# Altium PCB Transmitter.PcbDoc
Units mm, origin at the board's own origin, x right, y up, seen from the top; angles counter-clockwise.
Board outline 81.2 x 70.87 mm, 2 copper layers (Top Layer, Bottom Layer); 53 components, 19 nets, 126 pads, 96 vias.
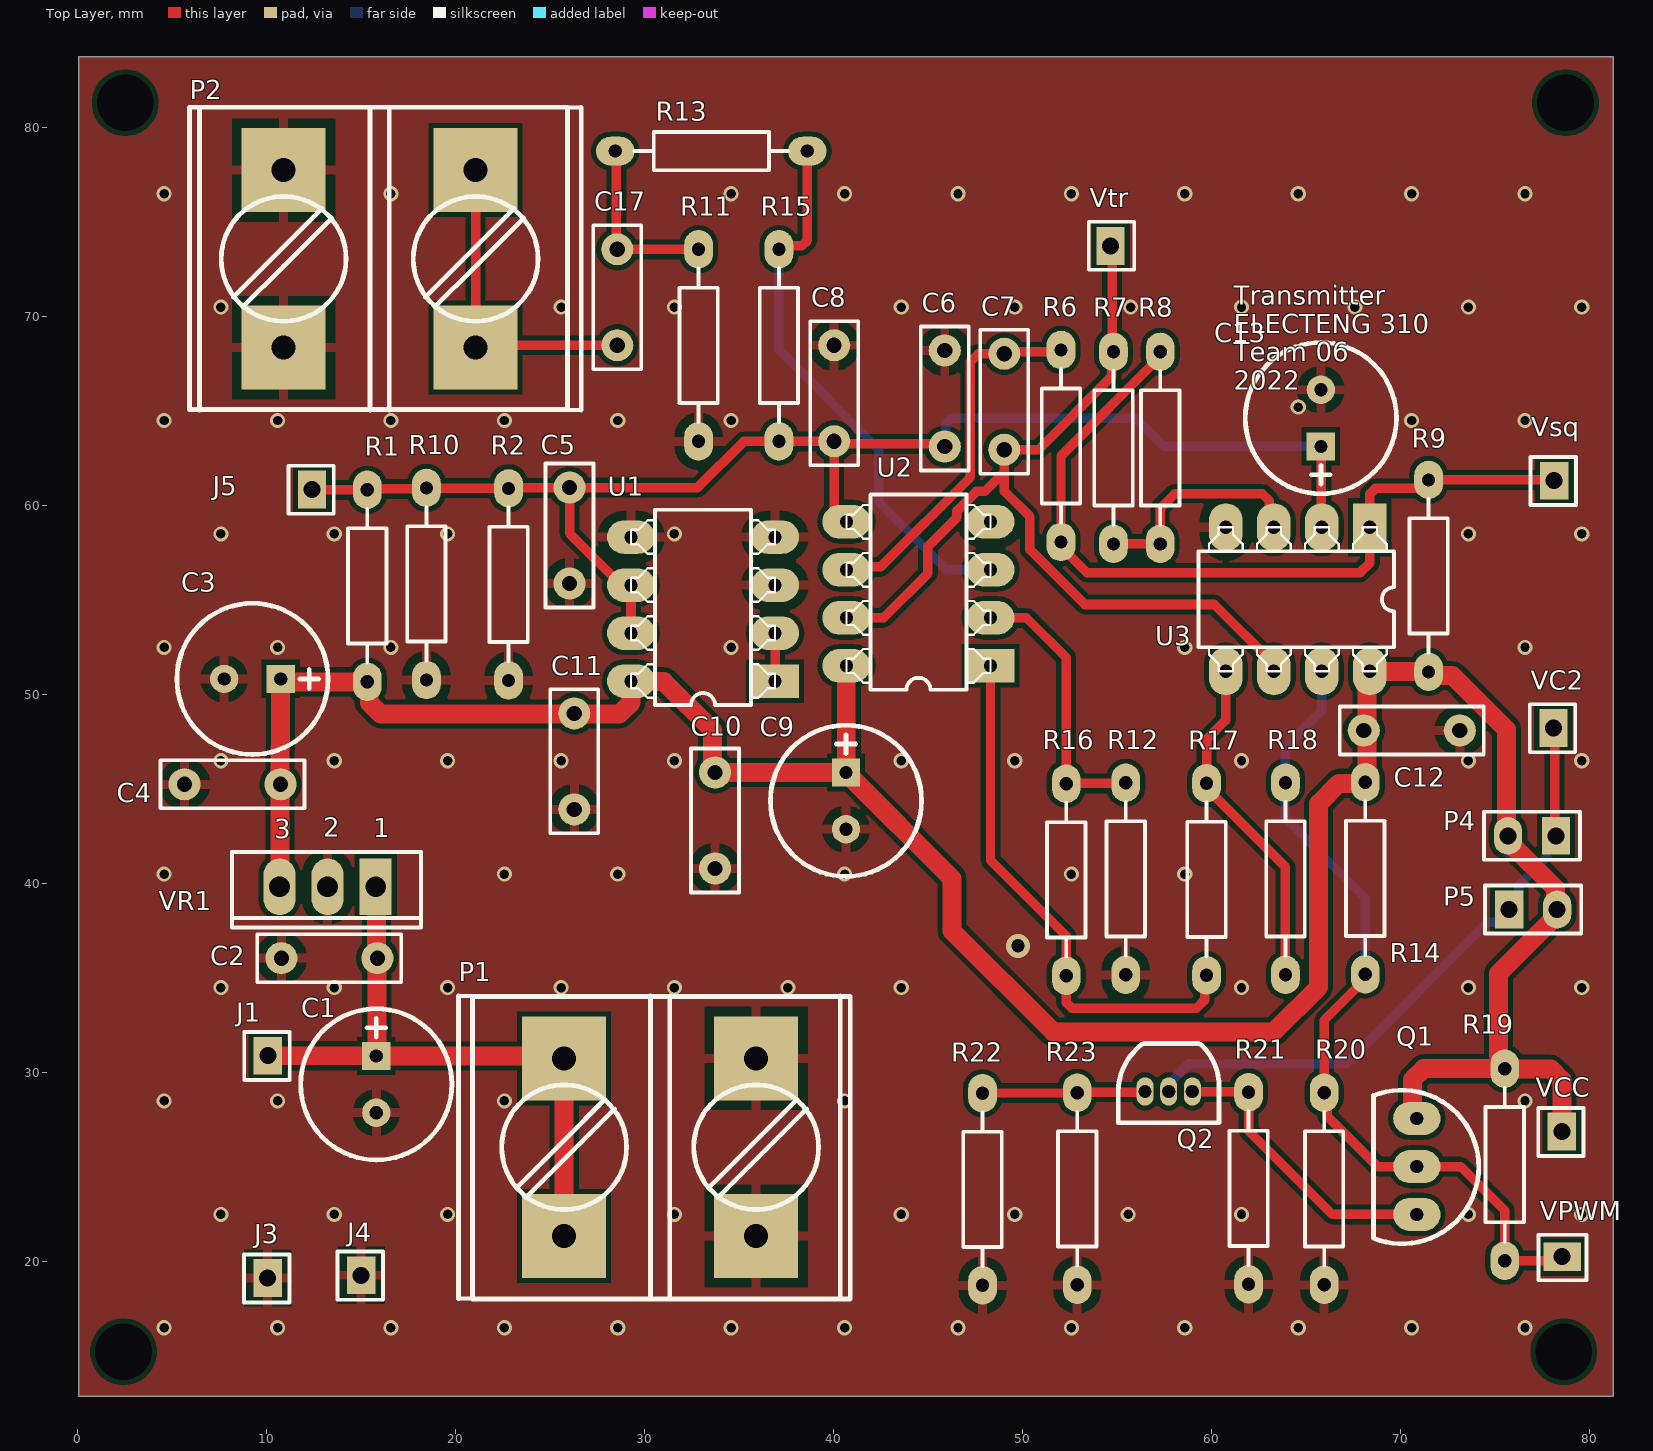
[diagram p0: Top Layer view]
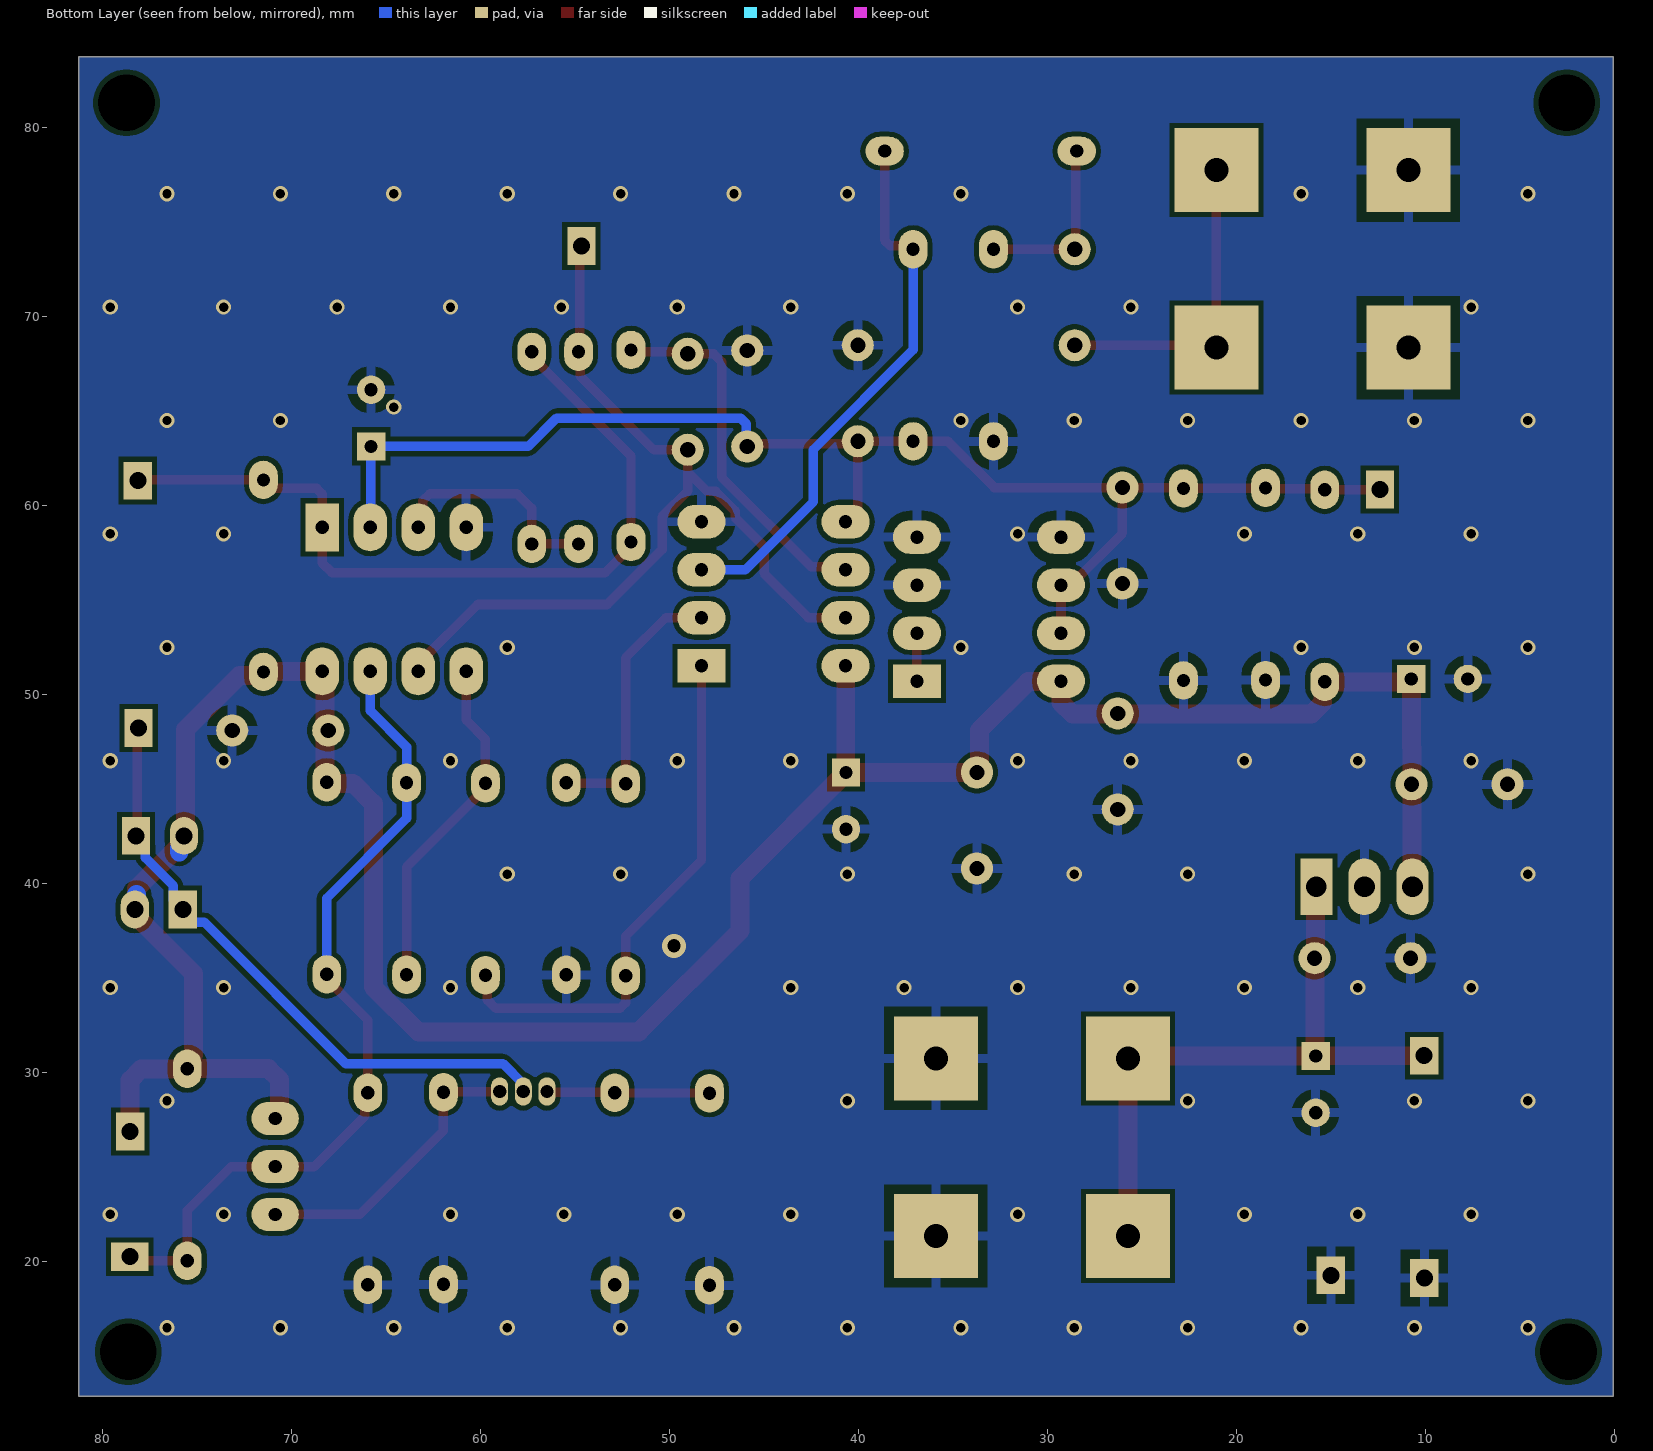
[diagram p1: Bottom Layer view, seen from below]

## Layer stack, top to bottom
Top Solder: solder mask 0.0102, Solder Resist, Dk 3.5
Top Layer: signal copper 0.0356
Dielectric 1: dielectric 0.32, FR-4, Dk 4.8
Bottom Layer: signal copper 0.0356
Bottom Solder: solder mask 0.0102, Solder Resist, Dk 3.5

## Board outline
0.075,12.85 0.075,83.725 81.275,83.725 81.275,12.85

## Design rules (kind name [scope] priority, off if disabled: settings)
Clearance [All] p1: gap=0.254 ignorepadtopadclearanceinfootprint=FALSE except(0: Arc-Hole Track-Hole SMDPad-Hole THPad-Hole Via-Hole Fill-Hole Poly-Hole Region-Hole Text-Hole)
HoleSize [All] p1: absolutevalues=TRUE maxlimit=5 minlimit=0.025 maxpercent=80.000 minpercent=20.000
MinimumSolderMaskSliver [All] p1: minsoldermaskwidth=0.1
PolygonConnect [All] p1: thpad.connectstyle=Relief thpad.reliefconductorwidth=0.5 thpad.reliefentries=4 thpad.polygonreliefangle="90 Angle" thpad.airgapwidth=0.5 smdpad.connectstyle=Relief smdpad.reliefconductorwidth=0.5 smdpad.reliefentries=4 smdpad.polygonreliefangle="90 Angle" smdpad.airgapwidth=0.5 via.connectstyle=Direct via.reliefconductorwidth=0.5 via.reliefentries=4 via.polygonreliefangle="90 Angle" via.airgapwidth=0.5
RoomDefinition "Triangle Wave Generator" [InComponentClass('Triangle Wave Generator')] p1: confinementstyle=ConfineIn formatcopy=TRUE lockcomponents=FALSE outline -25.4,-25.527 25.4,-25.527 25.4,-0.127 -25.4,-0.127
RoomDefinition Regulator [InComponentClass('Regulator')] p2: confinementstyle=ConfineIn formatcopy=TRUE lockcomponents=FALSE outline -25.4,-25.527 25.4,-25.527 25.4,-0.127 -25.4,-0.127
RoomDefinition "PWM Generator" [InComponentClass('PWM Generator')] p3: confinementstyle=ConfineIn formatcopy=TRUE lockcomponents=FALSE outline -25.4,-25.527 25.4,-25.527 25.4,-0.127 -25.4,-0.127
RoomDefinition ISR [InComponentClass('ISR')] p4: confinementstyle=ConfineIn formatcopy=TRUE lockcomponents=FALSE outline -25.4,-25.527 25.4,-25.527 25.4,-0.127 -25.4,-0.127
RoomDefinition Amplifier [InComponentClass('Amplifier')] p5: confinementstyle=ConfineIn formatcopy=TRUE lockcomponents=FALSE outline -25.4,-25.527 25.4,-25.527 25.4,-0.127 -25.4,-0.127
RoutingVias [All] p1: holewidth=0.711 width=1.27 viastyle="Through Hole" minholewidth=0.711 minwidth=1.27 maxholewidth=0.711 maxwidth=1.27
SilkToSilkClearance [All] p1: silktosilkclearance=0.1
SilkToSolderMaskClearance [IsPad] p1: minsilkscreentomaskgap=0.1 clearancetoexposedcopper=TRUE
SolderMaskExpansion [All] p1: expansion=0.102 istentingtop=FALSE
Width [All] p1: maxlimit=1 minlimit=0.254 preferedwidth=0.5
26 further rules are at their usual default settings.

## Classes and differential pairs
component class "PWM Generator": R14 R17 R18 VPWM
component class "Triangle Wave Generator": C6 C7 C8 C9 C10 C11 C12 R6 R7 R8 R9 U3 Vsq Vtr
component class Regulator: C1 C2 C3 C4 C5 C13 J1 J3 J4 J5 P1 R1 R2 R10 U1 VCC VR1
component class ISR: C17 P2 R11 R12 R13 R15 R16 U2
component class Amplifier: P4 P5 Q1 Q2 R19 R20 R21 R22 R23 VC2

## Components (designator, comment, footprint, x,y, rotation, side; value= is the part's Value field where it differs from the comment)
C1 "22uF" ece-CAPAD2TH0.3 15.825,30.85 r270 top
C2 "330 nF" ece-RAD0.2 15.88,36.025 r180 top
C3 "10uF" ece-CAPAD2TH0.3 10.775,50.8 r180 top
C4 "100 nF" ece-RAD0.2 10.755,45.225 r180 top
C5 "100 nF" ece-RAD0.2 26.05,60.925 r270 top
C6 "100nF" ece-RAD0.2 45.9,68.18 r270 top
C7 "1.5nF" ece-RAD0.2 49.05,68.005 r270 top
C8 "100nF" ece-RAD0.2 40.05,68.455 r270 top
C9 "10uF" ece-CAPAD2TH0.3 40.675,45.85 r270 top
C10 "100 nF" ece-RAD0.2 33.75,45.855 r270 top
C11 "100 nF" ece-RAD0.2 26.3,48.98 r270 top
C12 "100 nF" ece-RAD0.2 68.07,48.075 r0 top
C13 "10uF" ece-CAPAD2TH0.3 65.8,63.1 r90 top
C17 "1uF" ece-RAD0.2 28.575,68.453 r90 top
J1 "Vbatt" ece-HDR1 10.09,30.865 r0 top
J3 "GND" ece-HDR1 10.075,19.1 r0 top
J4 "GND" ece-HDR1 15.025,19.25 r0 top
J5 "Vcc/2" ece-HDR1 12.425,60.825 r0 top
P1 "Header 2" ece-TER2-10MM 35.925,30.723 r90 top
P2 "Header 2" ece-TER2-10MM 10.922,68.326 r270 top
P4 "Header 2" ece-HDR1X2 78.24,42.5 r180 top
P5 "Header 2" ece-HDR1X2 75.76,38.6 r0 top
Q1 "BC547/549" ece-TO-92Z 70.875,27.55 r270 top
Q2 "BC639" TO92 57.75,28.975 r0 top
R1 "18k" ece-AXIAL0.4 15.35,55.725 r270 top
R2 "39k" ece-AXIAL0.4 22.825,55.8 r90 top
R6 "10k" ece-AXIAL0.4 52.05,63.125 r90 top
R7 "330k" ece-AXIAL0.4 54.825,63.025 r270 top
R8 "820k" ece-AXIAL0.4 57.3,63.025 r90 top
R9 "1k" ece-AXIAL0.4 71.5,56.25 r270 top
R10 "27k" ece-AXIAL0.4 18.475,55.825 r90 top
R11 "8.2k" ece-AXIAL0.4 32.875,68.45 r90 top
R12 "68k" ece-AXIAL0.4 55.475,40.225 r270 top
R13 "68k" ece-AXIAL0.4 33.55,78.725 r180 top
R14 "1k" ece-AXIAL0.4 68.15,40.25 r270 top
R15 "33k" ece-AXIAL0.4 37.125,68.45 r90 top
R16 "33k" ece-AXIAL0.4 52.325,40.175 r90 top
R17 "1k" ece-AXIAL0.4 59.75,40.2 r270 top
R18 "27k" ece-AXIAL0.4 63.925,40.225 r270 top
R19 "2.2k" ece-AXIAL0.4 75.525,25.1 r270 top
R20 "1k" ece-AXIAL0.4 65.973,23.826 r270 top
R21 "1k" ece-AXIAL0.4 61.975,23.85 r270 top
R22 "39" ece-AXIAL0.4 47.9,23.8 r270 top
R23 "27" ece-AXIAL0.4 52.907,23.826 r270 top
U1 "TLC082" ECE-DIP8 36.92,50.685 r180 top
U2 "TLC082" ECE-DIP8 48.32,51.495 r180 top
U3 "LM393AN" ECE-DIP8 68.39,58.825 r270 top
VC2 "Vcc" ece-HDR1 78.103,48.212 r0 top
VCC "Vcc" ece-HDR1 78.55,26.85 r0 top (schematic designator J2)
VPWM "GND" ece-HDR1 78.568,20.238 r90 top
VR1 "*" ece-TO220 17.19,41.65 r180 top
Vsq "GND" ece-HDR1 78.144,61.291 r0 top
Vtr "GND" ece-HDR1 54.672,73.698 r180 top

## Footprints (in the part's own frame and the unit in brackets; to place one, negate y for a bottom-side part, rotate by r counter-clockwise, add the part's x,y. Pads: shape width x height; smd on the part's side, far side on the other; paste and mask are expansions set on the pad)
ece-AXIAL0.4 [mil]
  oval 80x60 hole 27.56: 1(-200,0) 2(200,0)
  silkscreen extent -160,-40 160,40
ece-CAPAD2TH0.3 [mm]
  rect 1.5x1.5 hole 0.7: 1(0,0)
  round 1.5 hole 0.7: 2(3,0)
  silkscreen extent -2.5,-4 5.5,4
ECE-DIP8 [mil]
  rect 100x70 hole 28: 1(0,0)
  oval 100x70 hole 28: 2(0,-100) 3(0,-200) 4(0,-300) 5(300,-300) 6(300,-200) 7(300,-100) 8(300,0)
  silkscreen extent 0,-357 300,50
ece-HDR1 [mm]
  rect 1.5x2 hole 0.9: 1(0,0)
  silkscreen extent -1.25,-1.29 1.15,1.25
ece-HDR1X2 [mm] "Header 2 way"
  rect 1.5x2 hole 0.9: 1(0,0)
  oval 1.5x2 hole 0.9: 2(2.54,0)
  silkscreen extent -1.27,-1.27 3.81,1.27
ece-RAD0.2 [mm]
  round 1.7 hole 0.8: 1(0,0) 2(5.08,0)
  silkscreen extent -1.27,-1.27 6.35,1.27
ece-TER2-10MM [mil]
  rect 175x175 hole 50: 1(-370,0) 1(0,0) 2(-370,400) 2(0,400)
  silkscreen extent -501,-196 130,620
ece-TO220 [mm]
  rect 1.7x3 hole 1.1: 1(1.4,1.85)
  oval 1.7x3 hole 1.1: 2(3.94,1.85) 3(6.48,1.85)
  silkscreen extent -1,0 9,4
ece-TO-92Z [mm]
  oval 1.75x2.5 hole 0.7: 1(0,0) 2(2.55,0) 3(5.08,0)
  silkscreen extent -1.49,-2.29 6.63,3.28
TO92 [mm]
  oval 0.9x1.5 hole 0.7: 1(-1.25,0) 2(0,0) 3(1.25,0)
  silkscreen extent -2.67,-1.65 2.67,2.54, body extent -2.61,-1.59 2.61,2.61, height 10

## Part data
C1 C3 C9 C13: library part "CAP 22uF TH", "Polarized Capacitor (Radial)", Manufacturer="Generic Components", Class I=Passive, Class II=Capacitor, Published=8-Jun-2000, Publisher="Altium Limited", Revision="July-2002: Re-released for DXP Platform."
C2 C4 C5 C6 C7 C8 C10 C11 C12 C17: library part CAP, "Capacitor Non Polarised Through Hole"
J1 J3 J4 J5 VC2 VCC VPWM Vsq Vtr: library part "Test pin", "Socket", LatestRevisionDate=17-Jul-2002, LatestRevisionNote="Re-released for DXP Platform.", Publisher="Altium Limited"
P1 P2: library part "TERMINAL 2", "Large 2 way screw connector"
P4 P5: "Header, 2-Pin", LatestRevisionDate=17-Jul-2002, LatestRevisionNote="Re-released for DXP Platform.", Publisher="Altium Limited"
Q1: "NPN Transistor"
Q2: "BC639 with correct footprint"
R1 R2 R6 R7 R8 R9 R10 R11 R12 R13 R14 R15 R16 R17 R18 R19 R20 R21 R22 R23: library part Res1, "Resistor", LatestRevisionDate=17-Jul-2002, LatestRevisionNote="Re-released for DXP Platform.", PackageReference=AXIAL-0.3, Published=8-Jun-2000, Publisher="Altium Limited"
U3: "Dual Comparator", ComponentLink1Description="Manufacturer Link", ComponentLink1URL=http://www.onsemi.com/site/products/taxonomy/0,4438,133,00.html, DatasheetVersion=1988, LatestRevisionDate=06-Jun-2005, LatestRevisionNote="Stylized 3D Model Added.", PackageDescription="DIP; 8 Leads; Row Spacing 7.62 mm; Pitch 2.54 mm", PackageReference=626-05, Published=17-Jul-2002, Publisher="Altium Limited"
VR1: library part VoltRegBig, "Voltage Regulator"

## Free pads (board coordinates)
  round 1.524 hole 3 unplated: 2(2.45,15.2) 2(2.54,81.28) 2(78.65,15.2) 2(78.74,81.28)

## Via types
v1: diameter 0.8, hole 0.5, Top Layer to Bottom Layer, 95 vias
v2: diameter 1.27, hole 0.711, Top Layer to Bottom Layer, 1 vias

## Nets (pads, with @x,y where several pads share a name; then routed paths per layer and width w, separated by ;. In a path a pad name is that pad's centre, name@x,y a point inside that pad or via, vN(x,y) a via of type N, cw(c..) or ccw(c..) an arc to the next point about the centre after c; other vN are vias at no path point)
GND: C1.2 C2.2 C3.2 C4.2 C5.2 C6.1 C8.1 C9.2 C10.2 C11.2 C12.2 C13.2 J3.1 J4.1 P1.1 P2.1 R2.1 R10.1 R11.1 R12.2 R20.2 R21.2 R22.2 R23.2 U1.3 U1.4 U1.5 U2.4 U3.4 VR1.2
  other v1: 4.6,16.473 10.6,16.473 16.6,16.473 22.6,16.473 28.6,16.473 34.6,16.473 40.6,16.473 46.6,16.473 52.6,16.473 58.6,16.473 64.6,16.473 70.6,16.473 76.6,16.473 7.6,22.473 13.6,22.473 19.6,22.473 31.6,22.473 43.6,22.473 49.6,22.473 55.6,22.473 61.6,22.473 73.6,22.473 79.6,22.473 4.6,28.473 10.6,28.473 22.6,28.473 40.6,28.473 76.6,28.473 7.6,34.473 13.6,34.473 19.6,34.473 25.6,34.473 31.6,34.473 37.6,34.473 43.6,34.473 61.6,34.473 73.6,34.473 79.6,34.473 4.6,40.473 22.6,40.473 28.6,40.473 40.6,40.473 52.6,40.473 58.6,40.473 7.6,46.473 13.6,46.473 19.6,46.473 25.6,46.473 31.6,46.473 43.6,46.473 49.6,46.473 61.6,46.473 73.6,46.473 79.6,46.473 4.6,52.473 10.6,52.473 16.6,52.473 34.6,52.473 58.6,52.473 76.6,52.473 7.6,58.473 13.6,58.473 19.6,58.473 31.6,58.473 73.6,58.473 79.6,58.473 4.6,64.473 10.6,64.473 16.6,64.473 22.6,64.473 28.6,64.473 34.6,64.473 70.6,64.473 76.6,64.473 64.6,65.186 7.6,70.473 25.6,70.473 31.6,70.473 43.6,70.473 49.6,70.473 55.731,70.473 61.6,70.473 67.6,70.473 73.6,70.473 79.6,70.473 4.6,76.473 16.6,76.473 34.6,76.473 40.6,76.473 46.6,76.473 52.6,76.473 58.6,76.473 64.6,76.473 70.6,76.473 76.6,76.473
  other v2: 49.775,36.675
NetC7_1: C7.1 R6.2 U2.6 | length 19.7
  Top Layer w0.5: U2.6 40.849,56.724 42.508,56.724 47.254,61.471 47.254,67.579 47.68,68.005 C7.1 49.15,68.105 51.95,68.105 R6.2
NetC7_2: C7.2 R7.1 U2.7 U3.6 Vtr.1 | length 48.5
  Top Layer w0.503: U2.7 42.66,54.035 45.011,56.386 45.011,57.809 46.545,59.343 46.545,59.693 47.576,60.724 48.019,60.724 49.05,61.755 ; Vtr.1 54.749,73.621 54.749,68.181 R7.1 54.731,68.011 54.731,66.806 50.85,62.925 C7.2 49.05,61.755 ; U3.6 63.31,51.586 60.158,54.738 53.31,54.738 50.402,57.646 50.402,59.386 49.05,60.738 49.05,61.755
NetC17_2: C17.2 R11.2 R13.2 | length 9.5
  Top Layer w0.5: R13.2 28.523,78.672 28.523,73.585 C17.2 28.577,73.531 32.874,73.531 R11.2
NetP4_1: P4.1 P5.1 Q2.2 VC2.1 | length 33
  Top Layer w0.503: VC2.1 78.172,48.143 78.172,42.568 P4.1
  Bottom Layer w0.503: Q2.2 57.75,29.376 58.825,30.452 67.152,30.452 74.624,37.924 75.262,37.924 75.76,38.423 P5.1 76.259,39.098 76.259,39.859 77.742,41.342 77.742,42.001 P4.1
NetQ1_2: Q1.2 R14.2 R18.1 R19.2 R20.1 U3.7 VPWM.1 | length 44.3
  Top Layer w0.5: R14.2 68.15,34.916 65.973,32.739 R20.1 66.13,28.749 66.13,27.67 68.8,25 Q1.2 73.2,25 75.525,22.675 R19.2 78.349,20.02 VPWM.1
  Bottom Layer w0.5: U3.7 65.85,49.125 63.925,47.2 R18.1 63.925,43.425 68.15,39.2 R14.2
NetQ1_3: Q1.3 Q2.3 R21.1 | length 15.8
  Top Layer w0.5: Q2.3 59.022,28.953 61.952,28.953 R21.1 61.975,26.9 66.405,22.47 Q1.3
NetQ2_1: Q2.1 R22.1 R23.1 | length 8.6
  Top Layer w0.5: R22.1 47.913,28.893 52.894,28.893 R23.1 52.942,28.941 56.466,28.941 Q2.1
NetR6_1: R6.1 R8.2 R9.1 U3.1 Vsq.1 | length 43.3
  Top Layer w0.5: R8.2 57.3,67.851 52.05,62.601 52.05,57.791 53.416,56.425 67.875,56.425 68.39,56.94 68.39,60.587 68.683,60.88 71.05,60.88 R9.1 78.105,61.33 Vsq.1
NetR7_2: R7.2 R8.1 U3.3 | length 12.1
  Top Layer w0.5: R7.2 R8.1 57.3,59.825 58.074,60.599 62.701,60.599 63.065,60.235 63.065,59.07 U3.3
NetR12_1: R12.1 R16.2 U2.2 | length 14.7
  Top Layer w0.503: U2.2 50.215,54.035 52.325,51.925 R16.2 52.35,45.28 55.45,45.28 R12.1
NetR13_1: R13.1 R15.2 U2.3 | length 29.4
  Top Layer w0.5: R15.2 37.305,73.71 38.337,73.71 38.63,74.003 R13.1
  Bottom Layer w0.5: R15.2 37.125,68.215 42.41,62.93 42.41,60.165 46,56.575 U2.3
NetR16_1: R16.1 R17.2 U2.1 | length 28.5
  Top Layer w0.5: U2.1 48.32,41.205 52.325,37.2 52.325,35.349 R16.1 52.325,33.675 52.625,33.375 59.214,33.375 59.65,33.811 59.65,35.02 R17.2
NetR17_1: R17.1 R18.2 U3.5 | length 18.2
  Top Layer w0.503: U3.5 60.77,48.62 59.75,47.6 R17.1 59.75,45.026 63.925,40.851 R18.2
NetU1_1: U1.1 U1.2 | length 2.5
  Top Layer w0.503: U1.1 U1.2
Vbatt: C1.1 C2.1 J1.1 P1.2 VR1.1 | length 34.1
  Top Layer w1: J1.1 15.81,30.865 C1.1 ; VR1.1 15.835,39.755 C2.1@15.835,36.07 ; C2.1 15.853,35.998 15.853,30.878 C1.1 ; P1.2@25.765,21.325 25.765,30.723 25.638,30.85 C1.1
VCC: C3.1 C4.1 C9.1 C10.1 C11.1 C12.1 P4.2 P5.2 Q1.1 R1.2 R9.2 R14.1 R19.1 U1.8 U2.8 U3.8 VCC.1 VR1.3 | length 148.5
  Top Layer w1: VR1.3 10.733,39.823 10.733,47.178 10.755,47.2 10.755,50.78 C3.1 10.93,50.645 R1.2 15.45,50.545 15.45,49.536 16.036,48.95 28.7,48.95 29.3,49.55 U1.8 29.322,50.663 31.037,50.663 33.616,48.084 33.616,45.989 33.753,45.853 40.672,45.853 C9.1 ; U2.8 40.688,51.482 40.688,45.862 C9.1 ; Q1.1 70.645,27.78 70.645,29.594 71.231,30.18 R19.1 ; VCC.1 78.55,29.579 77.964,30.165 75.54,30.165 R19.1 ; C9.1 46.278,40.247 46.278,37.474 51.631,32.121 63.299,32.121 65.674,34.496 65.674,44.199 66.751,45.276 68.096,45.276 68.25,45.43 68.25,51.065 U3.8 68.408,51.187 71.483,51.187 71.689,50.981 72.764,50.981 75.625,48.12 75.625,42.575 P4.2 75.7,42.224 78.204,39.719 78.204,38.696 P5.2 78.3,38.324 75.2,35.224 75.2,30.901 75.525,30.576 R19.1
  Bottom Layer w1: P4.2 75.7,42.115 75.95,41.865 P4.2@75.95,41.65 ; P5.2@78.204,39.396 78.204,38.696 P5.2
Vin: C17.1 P2.2 | length 16.9
  Top Layer w0.5: P2.2@21.082,77.724 21.082,68.326 21.209,68.453 C17.1
VREF: C5.1 C6.2 C8.2 C13.1 J5.1 R1.1 R2.2 R10.2 R15.1 U1.6 U1.7 U2.5 U3.2 | length 78.9
  Top Layer w0.503: J5.1 12.445,60.805 R1.1 15.4,60.855 18.425,60.855 R10.2 18.487,60.892 22.812,60.892 R2.2 22.847,60.902 26.028,60.902 C5.1 32.828,60.925 35.273,63.37 R15.1 37.128,63.372 40.048,63.372 C8.2 ; C5.1@26.05,60.882 26.05,58.5 28.785,55.765 U1.6 U1.7 ; U2.5 40.664,59.115 40.05,59.729 C8.2 ; C6.2 45.763,63.237 40.188,63.237 C8.2 ; C13.1 65.825,63.075 65.825,58.85 U3.2
  Bottom Layer w0.503: C6.2 45.958,63.158 45.958,64.305 46.252,64.6 55.985,64.6 57.485,63.1 C13.1 65.825,63.075 65.825,58.85 U3.2

## Polygon pours and split planes (outlines as drawn)
GND on Bottom Layer "GND_L02_P001" (solid, pour order 1): 0.075,83.725 0.075,12.85 81.275,12.85 81.275,83.725
GND on Top Layer "GND_L01_P002" (solid, pour order 2): 0.075,12.85 0.075,83.725 81.275,83.725 81.275,12.85

## Silkscreen, mask and mechanical layers (free items; w line width, h text height)
Top Overlay:
  text "Transmitter / ELECTENG 310 / Team 06 / 2022" at 61.2,66.1 h1
Mechanical 1:
  the board outline again, w0.254

## Text inside footprints (layer, text, board x,y; h text height)
VR1: Top Overlay "1" at 15.65,42.425 h1; Top Overlay "2" at 13.025,42.45 h1; Top Overlay "3" at 10.425,42.375 h1